# Altium PCB PCB1.PcbDoc
Units mil, origin at the board's own origin, x right, y up, seen from the top; angles counter-clockwise.
Board outline 2700 x 2100 mil, 2 copper layers (Top Layer, Bottom Layer); 28 components, 49 nets, 155 pads, 12 vias.
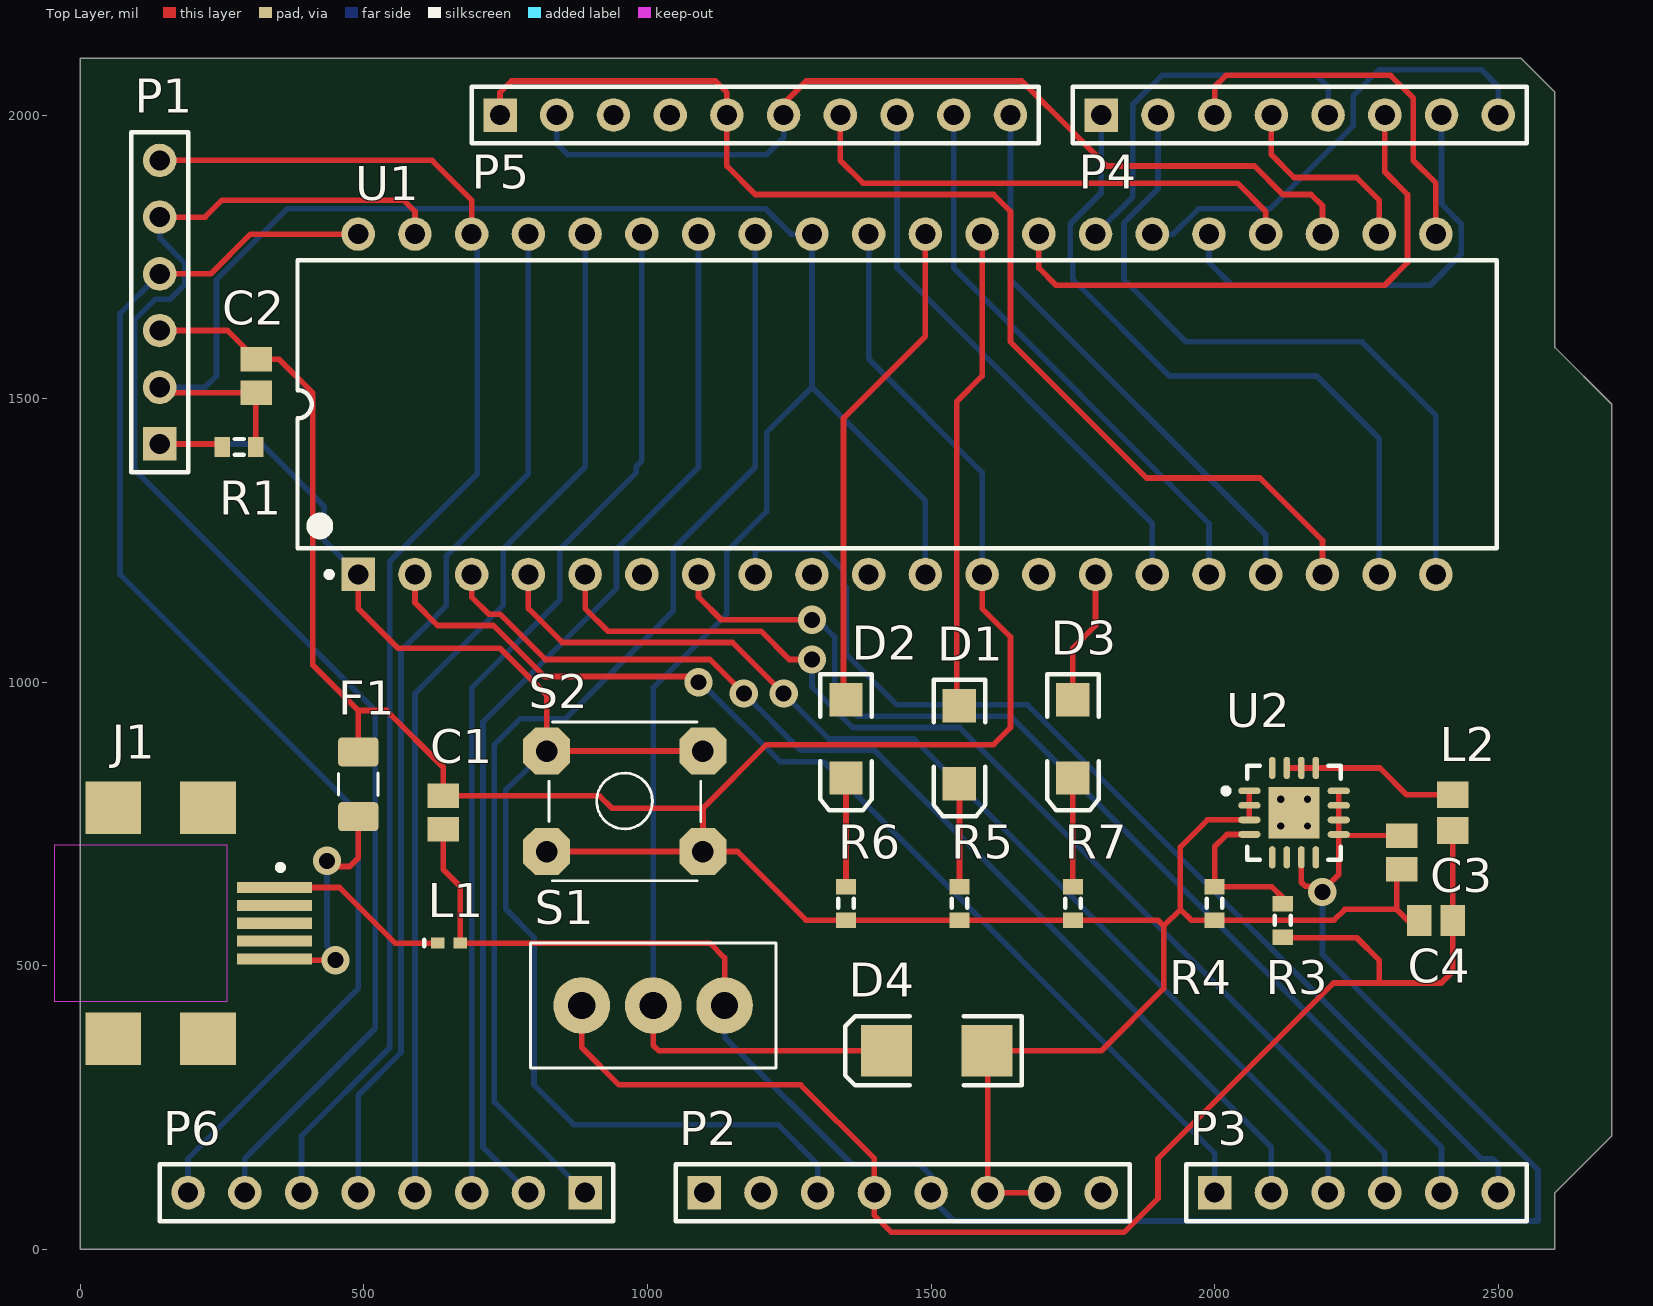
[diagram p0: Top Layer view]
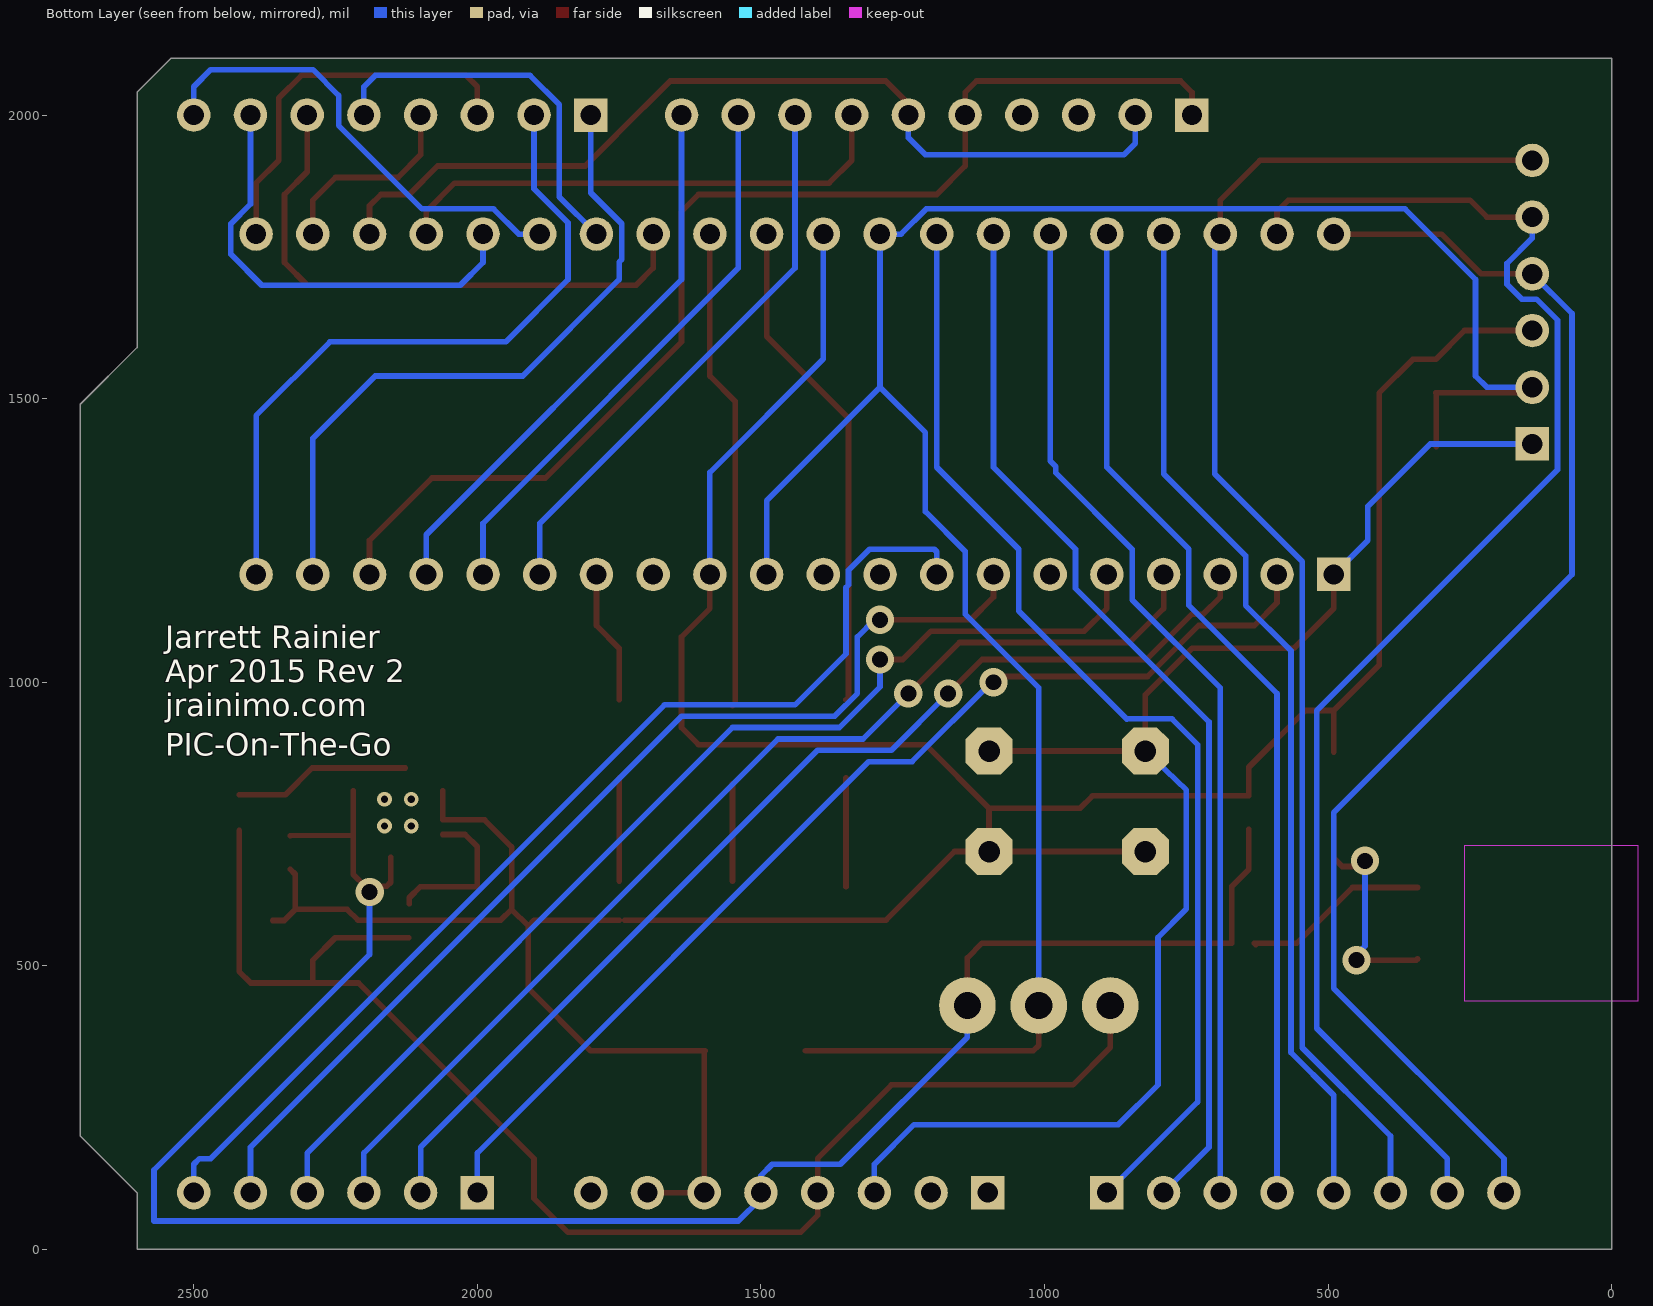
[diagram p1: Bottom Layer view, seen from below]

## Layer stack, top to bottom
Top Layer: signal copper 1.4
Dielectric: dielectric 12.6, FR-4, Dk 4.8
Bottom Layer: signal copper 1.4

## Board outline
0,0 2600,0 2600,100 2700,200 2700,1490 2600,1590 2600,2040 2540,2100 0,2100

## Design rules (kind name [scope] priority, off if disabled: settings)
Clearance [All] p1: gap=10
PolygonConnect [All] p1: connectstyle=Relief reliefconductorwidth=10 reliefentries=4 polygonreliefangle="90 Angle"
RoutingVias [All] p1: holewidth=28 width=50 viastyle="Through Hole" minholewidth=28 minwidth=50 maxholewidth=28 maxwidth=50
SilkscreenOverComponentPads [All] p1: minsilkscreentomaskgap=10
SolderMaskExpansion [All] p1: expansion=4
Width [All] p1: maxlimit=10 minlimit=10 preferedwidth=10
27 further rules are at their usual default settings.

## Classes and differential pairs
component class "USB PIC": U1 U2 U3

## Components (designator, comment, footprint, x,y, rotation, side; value= is the part's Value field where it differs from the comment)
C1 "Cap Pol3" C0805 640,770 r90 top
C2 "Cap Pol3" C0805 310,1540 r90 top
C3 "Cap Pol3" C0805 2330,700 r270 top
C4 "Cap Pol3" C0805 2390,580 r180 top
D1 "LED2" 3.2X1.6X1.1 1550,890 r270 top
D2 "LED2" 3.2X1.6X1.1 1350,900 r270 top
D3 "LED2" 3.2X1.6X1.1 1750,900 r270 top
D4 "D Schottky" SMB 1510,350 r180 top
F1 "Slow-blow" RESC3216X70N 490,820 r90 top
J1 "MicroUSB" microusb 210,575 r180 top
L1 "Inductor" 0402-A 650,540 r0 top
L2 "Inductor" 2029 2420,770 r270 top
P1 "PICKIT" HDR1X6 140,1420 r90 top
P2 "Header 8" HDR1X8 1100,100 r0 top
P3 "Header 6" HDR1X6 2000,100 r0 top
P4 "Header 8" HDR1X8 1800,2000 r0 top
P5 "Header 10" HDR1X10 740,2000 r0 top
P6 "Header 8" HDR1X8 890,100 r180 top
R1 "Res3" J1-0603 280,1415 r180 top
R3 "Res3" J1-0603 2120,580 r270 top
R4 "Res3" J1-0603 2000,610 r90 top
R5 "Res3" J1-0603 1550,610 r90 top
R6 "Res3" J1-0603 1350,610 r90 top
R7 "Res3" J1-0603 1750,610 r90 top
S1 "ON-ON" SWITCH_SPDT_SLIDER 1010,430 r180 top
S2 "RESET" TACT-SWITCH-TS1143 960,790 r0 top
U1 "PIC18F4520-I/P" PDIP600-P40 1440,1490 r90 top
U2 "AAT2148" RGV16_M 2140,770 r0 top

## Footprints (in the part's own frame and the unit in brackets; to place one, negate y for a bottom-side part, rotate by r counter-clockwise, add the part's x,y. Pads: shape width x height; smd on the part's side, far side on the other; paste and mask are expansions set on the pad)
3.2X1.6X1.1 [mm] "SMT LED; 2 Flat Leads"
  rect 1.5x1.5 smd: 1(-1.75,0) 2(1.75,0)
  silkscreen extent -2.9,-1.15 3.2,1.15
0402-A [mm] "Chip Inductor, Body 1.0x0.5mm, IPC High Density"
  rect 0.6x0.5 smd: 1(-0.5,0) 2(0.5,0)
  silkscreen extent -1.1,-0.15 -1.1,0.15, body extent -0.55,-0.3 0.55,0.3, height 0.55
2029 [mm] "Chip Inductor, Body 2.0x1.2mm, IPC High Density"
  rect 1.2x1.4 smd: 1(-0.8,0) 2(0.8,0)
  body extent -1.1,-0.7 1.1,0.7, height 0.55
C0805 [mm] "Chip Capacitor, Body 2.0x1.3mm, IPC High Density"
  rect 1.1x1.4 smd: 1(-0.75,0) 2(0.75,0)
  body extent -1.1,-0.72 1.1,0.72, height 1.4
HDR1X6 [mm] "Connector; Header; 6 Position"
  rect 1.5x1.5 hole 0.9: 1(0,0)
  round 1.5 hole 0.9: 2(2.54,0) 3(5.08,0) 4(7.62,0) 5(10.16,0) 6(12.7,0)
  silkscreen extent -1.27,-1.27 13.97,1.27
HDR1X8 [mm] "Connector; Header; 8 Position"
  rect 1.5x1.5 hole 0.9: 1(0,0)
  round 1.5 hole 0.9: 2(2.54,0) 3(5.08,0) 4(7.62,0) 5(10.16,0) 6(12.7,0) 7(15.24,0) 8(17.78,0)
  silkscreen extent -1.27,-1.27 19.05,1.27
HDR1X10 [mm] "Connector; Header; 10 Position"
  rect 1.5x1.5 hole 0.9: 1(0,0)
  round 1.5 hole 0.9: 2(2.54,0) 3(5.08,0) 4(7.62,0) 5(10.16,0) 6(12.7,0) 7(15.24,0) 8(17.78,0) 9(20.32,0) 10(22.86,0)
  silkscreen extent -1.27,-1.27 24.13,1.27
J1-0603 [mm] "Chip Resistor, Body 1.6x0.8mm, IPC High Density"
  rect 0.7x0.9 smd: 1(-0.75,0) 2(0.75,0)
  silkscreen extent -0.2,-0.35 0.2,0.35, body extent -0.85,-0.48 0.85,0.48, height 0.9
microusb [mm] "Connector; USB Mini-B, Sinking Type, SM; 5 Position; Right Angle"
  rect 3.35x0.5 smd mask+0.05: 1(-3.362,-1.6) 2(-3.362,-0.8) 3(-3.362,0) 4(-3.362,0.8)
  rect 3.35x0.5 smd paste+0 mask+0.05: 5(-3.362,1.6)
  rect 2.5x2.35 smd: MH1(-0.387,-5.175) MH2(3.863,-5.175) MH3(3.863,5.175) MH4(-0.387,5.175)
  Keep-Out Layer region: -1.25,-3.5 6.5,-3.5 6.5,3.5 -1.25,3.5
  silkscreen extent -3.75,-2.62 -3.5,-2.38, body extent -1.5,-3.85 6.8,3.86, height 0.35
PDIP600-P40 [mm] "DIP, 40-Leads, Row Spacing 15.24mm, Pitch 2.54mm, Body 51.8x13.5mm"
  rect 1.5x1.5 hole 0.9: 1(-7.62,24.13)
  round 1.5 hole 0.9: 2(-7.62,21.59) 3(-7.62,19.05) 4(-7.62,16.51) 5(-7.62,13.97) 6(-7.62,11.43) 7(-7.62,8.89) 8(-7.62,6.35) 9(-7.62,3.81) 10(-7.62,1.27) 11(-7.62,-1.27) 12(-7.62,-3.81) 13(-7.62,-6.35) 14(-7.62,-8.89) 15(-7.62,-11.43) 16(-7.62,-13.97) 17(-7.62,-16.51) 18(-7.62,-19.05) 19(-7.62,-21.59) 20(-7.62,-24.13) 21(7.62,-24.13) 22(7.62,-21.59) 23(7.62,-19.05) 24(7.62,-16.51) 25(7.62,-13.97) 26(7.62,-11.43) 27(7.62,-8.89) 28(7.62,-6.35) 29(7.62,-3.81) 30(7.62,-1.27) 31(7.62,1.27) 32(7.62,3.81) 33(7.62,6.35) 34(7.62,8.89) 35(7.62,11.43) 36(7.62,13.97) 37(7.62,16.51) 38(7.62,19.05) 39(7.62,21.59) 40(7.62,24.13)
  silkscreen extent -7.74,-26.85 6.45,26.85, body extent -7.3,-26.85 7.3,26.85, height 6.35
RESC3216X70N [mm] "Chip Resistor, Body 3.2x1.6mm, EIA 1206, IPC Medium Density"
  round 0.508 on Mech15: 0(0,0)
  rrect25% 1.3x1.8 smd: 1(-1.45,0) 2(1.45,0)
  silkscreen extent -0.51,-0.89 0.51,0.89, body extent -1.62,-0.82 1.63,0.83, height 0.69
RGV16_M [mm] "16-Pin Plastic Quad Flat No-Lead 0.65 mm Pitch, IPC Low Density"
  oval 1x0.3 smd: 1(-2,0.975) 2(-2,0.325) 3(-2,-0.325) 4(-2,-0.975) 9(2,-0.975) 10(2,-0.325) 11(2,0.325) 12(2,0.975)
  oval 0.3x1 smd: 5(-0.975,-2) 6(-0.325,-2) 7(0.325,-2) 8(0.975,-2) 13(0.975,2) 14(0.325,2) 15(-0.325,2) 16(-0.975,2)
  rect 2.3x2.3 smd: 17(0,0)
  silkscreen extent -3.17,-2.1 2.1,2.1, body extent -2.07,-2.07 2.07,2.07, height 1
SMB [mm] "DO-214-AA/SMB; 2 C-Bend Leads; Body 5.3 x 3.6 mm, inc. leads (LxW)"
  rect 2.3x2.3 smd: 1(-2.25,0) 2(2.25,0)
  silkscreen extent -3.8,-1.55 4.1,1.55
SWITCH_SPDT_SLIDER [mil] "TE Connectivity SLS121PC04 SPDT slider"
  round 100 hole 48: 1(-126,0) 2(0,0) 3(126,0)
  silkscreen extent -217,-110 217,110, body extent -216,-110 217,110, height 394
TACT-SWITCH-TS1143 [mm] "Bondtact sealed TH tact switch"
  round 0.508 on Mech15: 0(0,0)
  oct 2.1x2.1 hole 0.965: 1(-3.5,-2.25) 1(3.5,-2.25) 2(-3.5,2.25) 2(3.5,2.25)
  silkscreen extent -3.4,-3.56 3.4,3.56, body extent -4.13,-3.25 4.13,3.25, height 4.3

## Part data
C1 C2 C3 C4: "Polarized Capacitor (Surface Mount)"
D1 D2 D3: "Typical RED, GREEN, YELLOW, AMBER GaAs LED"
D4: "Schottky Diode"
F1: library part FUSE_160mA_1206, "Fuse 750mA 6VDC 1206 SMD"
J1: "USB On-The-Go (OTG) Mini-B Receptacle, Right Angle, SMT, 0.80mm (.031\") Pitch, Solder Tabs with Back Cover, Recessed Type"
P1: library part "Header 6", "Header, 6-Pin"
P2 P4 P6: "Header, 8-Pin"
P3: "Header, 6-Pin"
P5: "Header, 10-Pin"
R1 R3 R4 R5 R6 R7: "Resistor"
S1: library part SW_THD_SPDT_On-On, "Switch THD vertical toggle SPDT"
S2: library part SW_THT_PB_4.3mm, "Switch, tact, 4.3mm stem"
U1: "Enhanced Flash Microcontroller with 10-Bit A/D and nanoWatt Technology, 32K Flash, 40-Pin PDIP, Industrial Temperature Range"

## Via types
v1: diameter 50, hole 28, Top Layer to Bottom Layer, 8 vias
v2: diameter 25.98, hole 12.99, Top Layer to Bottom Layer, tented top, 4 vias

## Nets (pads, with @x,y where several pads share a name; then routed paths per layer and width w, separated by ;. In a path a pad name is that pad's centre, name@x,y a point inside that pad or via, vN(x,y) a via of type N, cw(c..) or ccw(c..) an arc to the next point about the centre after c; other vN are vias at no path point)
3V3: C4.1 L2.2 P2.4 R3.2 S1.3 | length 2510
  Top Layer w10: S1.3 884,356 950,290 1270,290 1400,160 P2.4 1400,60 1430,30 1840,30 1900,90 1900,160 2209.53,469.53 2290,469.53 ; R3.2@2120.94,549.53 2250.47,549.53 2290,510 2290,469.53 ; 2290,469.06 2290,469.53 ; L2.2 2420,490 2399.53,469.53 2290,469.53
5V: C1.1 C3.1 L1.2 P2.5 S1.1 U2.7 U2.9 U2.10 U2.11 U2.12 | length 3511.8
  Top Layer w10: C1.1 640,670 670,640 670,540 1110,540 1136,514 S1.1 ; U2.7 2152.8,647.2 2160,640 2197.48,640 2218.74,661.26 U2.10 U2.11 U2.12 ; U2.9@2220,730 C3.1
  Bottom Layer w10: S1.1 1136,374 1360,150 1480,150 1500,130 ; P2.5@1500,90 1540,50 2570,50 2570,140 2190,520 2190,620 2180,620 v1(2190,630)
GND: C1.2 C2.2 C3.2 C4.2 D4.1 F1.2 P1.3 P2.6 P2.7 R4.1 R5.1 R6.1 R7.1 S2.1 U1.12 U1.31 U2.1 U2.2 U2.3 | length 6153.1
  Top Layer w10: P1.3 259.53,1620 C2.2 350.47,1569.53 410,1510 410,1030 490,950 ; F1.2 490,950 ; S2.1@822.2,701.42 S2.1@1097.8,701.42 ; U1.12 1590,1130 1640,1080 1640,920 1610,890 1210,890 1097.8,777.8 ; D4.1 1800,350 1910,460 1910,570 ; D4.1@1600,348.58 P2.6 P2.7 ; R7.1@1740,580.47 R5.1 R6.1 1279.53,580.47 1158.58,701.42 S2.1@1097.8,701.42 ; R7.1 1899.53,580.47 1910,570 ; U2.1 U2.2 U2.3 1987.2,757.2 1939.53,709.53 1939.53,599.53 ; C3.2 2320.94,661.42 2320.94,599.53 ; C4.2 2340.47,580 2320.94,599.53 ; 490,950 540,950 640,850 C1.2 915.47,799.53 937.2,777.8 1097.8,777.8 ; S2.1@1097.8,701.42 1097.8,777.8 ; 1910,570 1939.53,599.53 ; 1939.53,599.53 1958.58,580.47 R4.1 2210.47,580.47 2229.53,599.53 2320.94,599.53
  Bottom Layer w10: U1.31 1390,1570 1590,1370 U1.12
LVP: P1.6 P6.6 U1.38 | length 2461.5
  Top Layer w10: P1.6 620,1920 690,1850 U1.38
  Bottom Layer w10: P6.6 390,200 545.47,355.47 545.47,1212.97 700,1367.5 700,1780 U1.38
NetD1_2: D1.2 R5.2 | length 171.6
  Top Layer w10: R5.2@1550,649.53 D1.2
NetD2_2: D2.2 R6.2 | length 191.6
  Top Layer w10: R6.2 D2.2
NetD3_2: D3.2 R7.2 | length 181.6
  Top Layer w10: R7.2@1750,649.53 D3.2
NetF1_1: F1.1 J1.5 | length 425
  Top Layer w10: J1.5 344.37,510 v1(450,510) ; v1(435,685) 445,675 475,675 490,690 F1.1
  Bottom Layer w10: v1(435,685) 435,535 v1@455,515
NetJ1_1: J1.1 L1.1 | length 332.8
  Top Layer w10: J1.1 457.01,637.99 555,540 L1.1 L1.1@627.32,537.01
NetL2_1: L2.1 U2.13 U2.14 U2.15 | length 312.4
  Top Layer w10: U2.15 U2.14 U2.13 2291.26,848.74 2338.5,801.5 L2.1
NetR3_1: R3.1 R4.2 U2.4 | length 279.2
  Top Layer w10: U2.4 2021.61,731.61 2000,710 R4.2 2100.47,639.53 2120,620 R3.1
PGC: P1.5 P6.7 U1.39 | length 2572.4
  Top Layer w10: P1.5 220,1820 250,1850 570,1850 590,1830 U1.39
  Bottom Layer w10: P1.5 140,1782.97 184.53,1738.44 184.53,1701.56 158.44,1675.47 132.5,1675.47 95.47,1638.44 95.47,1374.53 520,950 520,390 290,160 P6.7
PGD: P1.4 P6.8 U1.40 | length 2326.2
  Top Layer w10: P1.4 230,1720 300,1790 U1.40
  Bottom Layer w10: P1.4 70,1650 70,1190 490,770 490,460 190,160 P6.8
RA0: P3.1 U1.2 | length 1931.8
  Top Layer w10: U1.2 590,1140 630,1100 728.28,1100 818.28,1010 1080,1010 v1(1090,1000)
  Bottom Layer w10: v1(1090,1000) 1093.43,1000 1233.43,860 1310,860 2000,170 P3.1
RA1: P3.2 U1.3 | length 1930.1
  Top Layer w10: U1.3 690,1150 720,1120 740,1120 820,1040 1108.28,1040 ; 1110,1040 v1(1170,980)
  Bottom Layer w10: v1(1170,980) 1270,880 1400,880 2100,180 P3.2
RA2: P3.3 U1.4 | length 1937.6
  Top Layer w10: U1.4 790,1130 850,1070 1150,1070 v1(1240,980)
  Bottom Layer w10: v1(1240,980) 1320,900 1470,900 2200,170 P3.3
RA3: P3.4 U1.5 | length 1965.9
  Top Layer w10: U1.5 890,1130 930,1090 1200,1090 1250,1040 v1(1290,1040)
  Bottom Layer w10: v1(1290,1040) 1290,991.72 1361.72,920 1550,920 2300,170 P3.4
RA4: U1.6
RA5: P3.5 U1.7 | length 1908.7
  Top Layer w10: U1.7 1090,1150 1130,1110 v1(1290,1110) ; v1@1280,1120 v1(1290,1110) ; v1@1300,1100 v1(1290,1110)
  Bottom Layer w10: v1@1300,1110 1330,1080 1330,980 1370,940 1640,940 2400,180 P3.5
RA6: D3.1 U1.14 | length 237.7
  Top Layer w10: D3.1 1750,1060 1790,1100 U1.14
RA7: U1.13
RB0: P6.1 U1.33 | length 1993.8
  Bottom Layer w10: 854.92,934.92 1045.47,1125.47 1045.47,1234.53 1190,1379.06 U1.33 ; 854.92,935.32 775.32,935.32 730,890 730,741.12 730,260 P6.1
RB1: P6.2 U1.34 | length 1880.5
  Bottom Layer w10: P6.2 710,180 710,930 945.47,1165.47 945.47,1234.53 1090,1379.06 U1.34
RB2: P6.3 U1.35 | length 1814.3
  Bottom Layer w10: P6.3 690,990 845.47,1145.47 845.47,1234.53 980,1369.06 980,1380 990,1390 U1.35
RB3: P6.4 U1.36 | length 1814.3
  Bottom Layer w10: P6.4 590,980 745.47,1135.47 745.47,1234.53 890,1379.06 U1.36
RB4: P6.5 U1.37 | length 1814.3
  Bottom Layer w10: P6.5 490,271.72 565.47,347.19 565.47,1055.47 645.47,1135.47 645.47,1222.97 790,1367.5 U1.37
RC0: P5.8 U1.15 | length 996.4
  Bottom Layer w10: P5.8 1440,1730 1890,1280 U1.15
RC1: P5.9 U1.16 | length 996.4
  Bottom Layer w10: P5.9 1540,1730 1990,1280 U1.16
RC2: P5.10 U1.17 | length 996.4
  Bottom Layer w10: P5.10 1640,1710 2090,1260 U1.17
RC3: P5.1 P5.5 U1.18 | length 2104.7
  Top Layer w10: P5.1 740,2040 760,2060 1120,2060 1140,2040 P5.5 1140,1910 1190,1860 1610,1860 1640,1830 1640,1600 1880,1360 2080,1360 2190,1250 U1.18
RC4: P5.2 P5.6 U1.23 | length 1638.6
  Top Layer w10: P5.6 1240,2020 1280,2060 1660,2060 1755.47,1964.53 1755.47,1964.26 1809.73,1910 2070,1910 2120,1860 2170,1860 2190,1840 U1.23
  Bottom Layer w10: P5.2 840,1950 860,1930 1210,1930 1240,1960 P5.6
RC5: P5.7 U1.24 | length 907.3
  Top Layer w10: P5.7 1340,1920 1380,1880 2040,1880 2090,1830 U1.24
RC6: P4.7 U1.25 | length 793.5
  Bottom Layer w10: U1.25 1990,1740 2030,1700 2380,1700 2434.53,1754.53 2434.53,1808.44 2400,1842.97 P4.7
RC7: P4.8 U1.26 | length 823.6
  Bottom Layer w10: U1.26 1927.03,1790 1971.56,1834.53 2097.5,1834.53 2244.53,1981.56 2244.53,2034.53 2290,2080 2470,2080 2500,2050 P4.8
RD0: P4.1 U1.19 | length 1210.4
  Bottom Layer w10: P4.1 1800,1862.97 1745.47,1808.44 1745.47,1745.47 1750,1740.94 1750,1710 1920,1540 2180,1540 2290,1430 U1.19
RD1: P4.2 U1.20 | length 1244.3
  Bottom Layer w10: P4.2 1900,1870 1840,1810 1840,1710 1950,1600 2260,1600 2390,1470 U1.20
RD2: P4.3 U1.21 | length 681.4
  Top Layer w10: P4.3 2000,2050 2020,2070 2310,2070 2350,2030 2350,1920 2390,1880 U1.21
RD3: P4.4 U1.22 | length 353.1
  Top Layer w10: P4.4 2100,1930 2140,1890 2250,1890 2290,1850 U1.22
RD4: P4.5 U1.27 | length 679.7
  Bottom Layer w10: U1.27 1855.47,1855.47 1855.47,2018.44 1907.03,2070 2180,2070 2200,2050 P4.5
RD5: P4.6 U1.28 | length 1015.6
  Top Layer w10: U1.28 1690,1730 1720,1700 2300,1700 2340,1740 2340,1860 2300,1900 P4.6
RD6: D1.1 U1.29 | length 851.4
  Top Layer w10: D1.1 1545.47,963.43 1545.47,1495.47 1590,1540 U1.29
RD7: D2.1 U1.30 | length 882.8
  Top Layer w10: D2.1 1345.47,973.43 1345.47,1465.47 1490,1610 U1.30
RE0: P3.6 U1.8 | length 1934.9
  Bottom Layer w10: U1.8 1190,1230 1194.53,1234.53 1308.44,1234.53 1345.47,1197.5 1345.47,1171.56 1350,1167.03 1350,1050 1440,960 1670,960 2470,160 2490,160 2500,150 P3.6
RE1: U1.9
RE2: U1.10
VDD: C2.1 D4.2 P1.2 R1.1 S1.2 U1.11 U1.32 | length 4041.6
  Top Layer w10: P1.2 149.53,1510.47 C2.1 ; R1.1 C2.1@309.53,1510 ; S1.2 1010,360 1020,350 D4.2
  Bottom Layer w10: P1.2 220,1520 240,1540 240,1710 364.53,1834.53 1208.44,1834.53 1252.97,1790 U1.32 1290,1520 ; S1.2 1010,990 1140,1120 1140,1230.77 1210,1300.77 1210,1440 1290,1520 ; U1.11 1490,1320 1290,1520
VIN: P2.8
VPP: P1.1 P2.3 R1.2 S2.2 U1.1 | length 2664.2
  Top Layer w10: P1.1 R1.2@245.47,1420 ; U1.1 490,1130 560,1060 740,1060 822.2,977.8 822.2,878.58 S2.2@1097.8,878.58
  Bottom Layer w10: P1.1 320,1420 430,1310 430,1250 U1.1 ; S2.2@822.2,878.58 750,810 750,600 800,550 800,290 870,220 1230,220 1300,150 P2.3
VSS: P5.4
pads on no net: F1.0 J1.2 J1.3 J1.4 J1.MH1 J1.MH2 J1.MH3 J1.MH4 P2.1 P2.2 P5.3 S2.0 U2.5 U2.6 U2.8 U2.16 U2.17
copper on no net:
  other v2: 2116.38,746.38 2163.62,746.38 2116.38,793.62 2163.62,793.62

## Silkscreen, mask and mechanical layers (free items; w line width, h text height)
Bottom Overlay:
  text "Jarrett Rainier" at 2550,1060 h40
  text "Apr 2015 Rev 2" at 2550,1000 h40
  text "jrainimo.com" at 2550,940 h40
  text "PIC-On-The-Go" at 2550,870 h40